# EAGLE board Loggrid-Sensor (EAGLE 5.11)
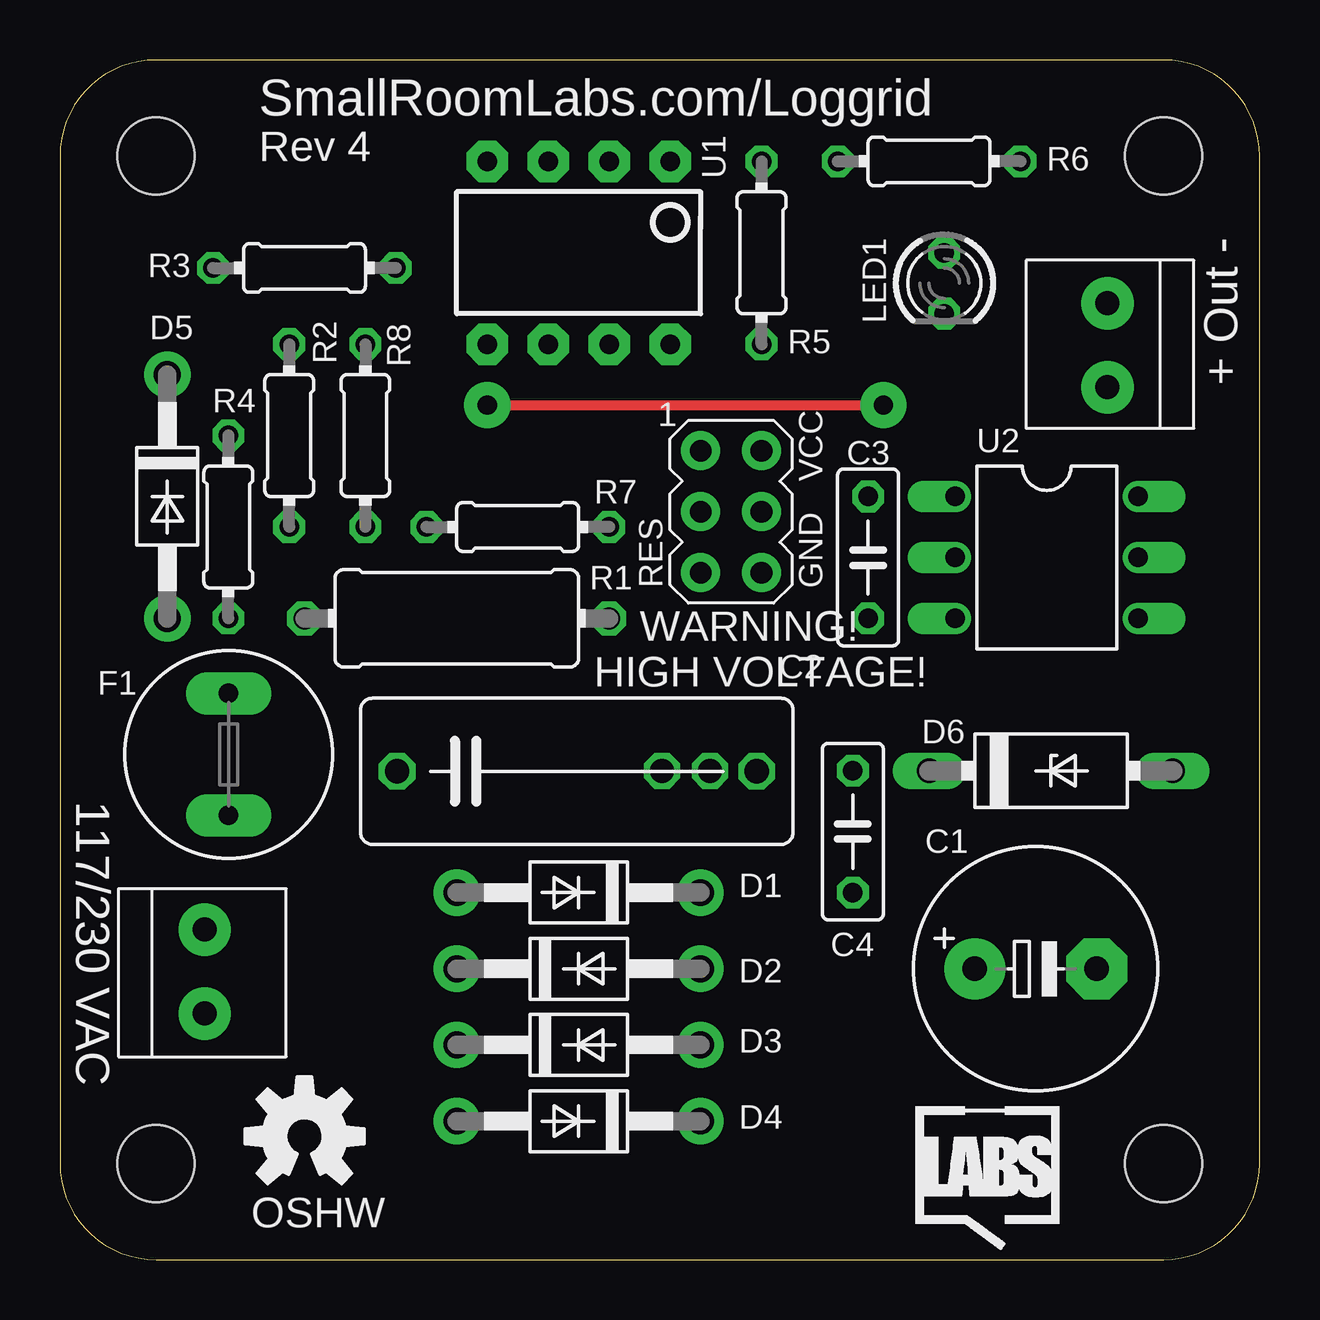
[diagram p0: board, top side]
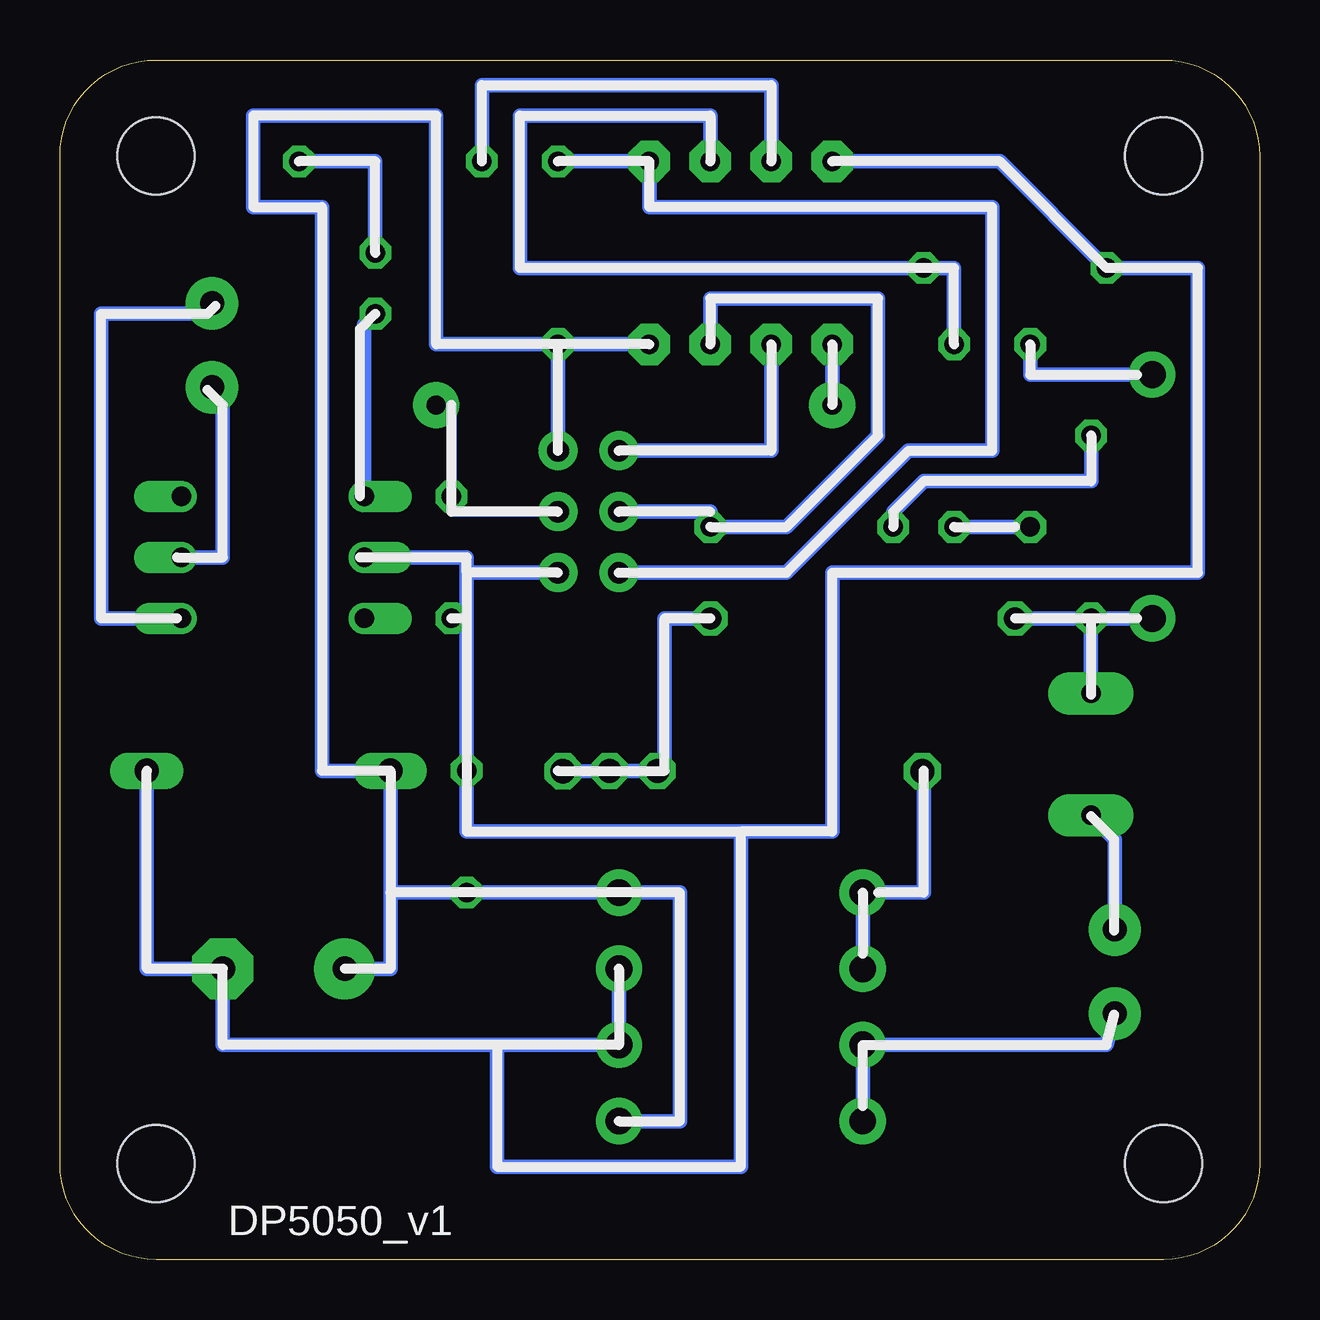
[diagram p1: board, bottom side, seen from below]

Size 50 x 50 mm. Coordinates in mm from the lower left corner, seen from the top.
Copper layers (1*16): Top 0.035mm / dielectric 1.5mm / Bottom 0.035mm
Design rules "Fusion_eagle_rule_v1.1": minimum track width 6mil, minimum drill 12mil, track to track 6mil, track to pad 6mil, pad to pad 6mil, via to via 6mil, smd to smd 0mil, copper to edge 10mil, drill to drill 10mil, minimum pad ring 10mil, minimum via ring 6mil, stop-mask expansion 2mil, vias tented up to drill 100mil, thermal gap 10mil
Net classes: 0 default: width 0.406 mm, drill 0.305 mm, clearance 0.61 mm; 1 HV: width 0.406 mm, clearance 0.61 mm
tKeepout: area 12.7,1.3 to 33.1,20.4

## Footprints (pad centres in the part's own frame; a part is rotated, then mirrored left to right if it is on the bottom)
E5-10,5 = drill 1.016 pad 2.54 round: + -2.54,0 | drill 1.016 pad 2.54 octagon: - 2.54,0
C150-064X183 = drill 1.016 octagon: 1 -7.493,0; 2 7.493,0
C050-025X075 = drill 0.813 octagon: 1 -2.54,0; 2 2.54,0
DO41-10 = drill 1.118 pad 1.93 round: A 5.08,0; C -5.08,0
F126Z10 = drill 1.016 long: A 5.08,0; C -5.08,0
TR5 = drill 0.813 pad 1.778 long: 1 -2.54,0; 2 2.54,0
AVRISP = drill 0.9 pad 1.626 round: 1 -1.27,2.54; 2 1.27,2.54; 3 -1.27,0; 4 1.27,0; 5 -1.27,-2.54; 6 1.27,-2.54
1X2-3.5MM = drill 1 pad 2.184 round: 1 1.8,0; 2 -1.7,0
LED3MM = drill 0.813 octagon: A -1.27,0; K 1.27,0
DP5050_V1 = hole 3.2: 4,4; 46,4; 46,46; 4,46
0411/12 = drill 0.914 octagon: 1 -6.35,0; 2 6.35,0
0204/7 = drill 0.813 octagon: 1 -3.81,0; 2 3.81,0
DIP08 = drill 0.813 pad 1.727 octagon: 1 -3.81,-3.81; 2 -1.27,-3.81; 3 1.27,-3.81; 4 3.81,-3.81; 5 3.81,3.81; 6 1.27,3.81; 7 -1.27,3.81; 8 -3.81,3.81
DIL06 = drill 0.813 offset: 1 -2.54,-3.81; 2 0,-3.81; 3 2.54,-3.81; 4 2.54,3.81; 5 0,3.81; 6 -2.54,3.81

## Placement (x,y rotation side)
C1  470u  [E5-10,5]  40.67,12.12 0 top
C2  0.33uF  [C150-064X183]  21.54,20.35 0 top
C3  100nF  [C050-025X075]  33.69,29.27 270 top
C4  100nF  [C050-025X075]  33.05,17.84 90 top
D1  1N4004  [DO41-10]  21.62,15.29 180 top
D2  1N4004  [DO41-10]  21.62,12.12 0 top
D3  1N4004  [DO41-10]  21.62,8.95 0 top
D4  1N4004  [DO41-10]  21.62,5.77 180 top
D5  1N4004  [DO41-10]  4.48,31.8 270 top
D6  5.1v  [F126Z10]  41.3,20.38 0 top
F1  [TR5]  7.03,21.05 90 top
ICSP  AVRISP-6  [AVRISP]  27.97,31.17 0 top
J1  1X2-3.5MM  [1X2-3.5MM]  6.03,12.05 270 top
J2  1X2-3.5MM  [1X2-3.5MM]  43.66,38.05 90 top
LED1  [LED3MM]  36.86,40.7 270 top
PCB1  PCB_DP_SQUARE-5X5  [DP5050_V1]  0,0 0 top
R1  270  [0411/12]  16.54,26.73 0 top
R2  470k  [0204/7]  9.55,34.34 270 top
R3  4k7  [0204/7]  10.19,41.33 0 top
R4  470k  [0204/7]  7.02,30.54 90 top
R5  20k  [0204/7]  29.24,41.96 270 top
R6  270  [0204/7]  36.23,45.77 0 top
R7  470k  [0204/7]  19.08,30.54 0 top
R8  470k  [0204/7]  12.73,34.34 90 top
U1  ATTINY45DIP8  [DIP08]  21.62,41.96 180 top
U2  4N35  [DIL06]  41.13,29.27 270 top
U$2  [SRL-LOGO-SILK-5MM]  35.62,1.45 0 top
U$3  [OSHW-LOGO-M]  10.19,5.13 0 top

## Library data of the parts
C1 = resistor
C2-C4 R1-R8 = rcl
D1-D5 ICSP J1 J2 = adafruit
D6 = diode
F1 = fuse; OC_FARNELL: unknown; OC_NEWARK: unknown
LED1 = led
PCB1 = dp_devices
U1 U$3 = SparkFun
U2 = optocoupler; MF: FAIRCHILD SEMICONDUCTOR; MPN: 4N35; OC_FARNELL: 1328375; OC_NEWARK: 72K9946
U$2 = SmallRoomLabs

## Nets
GND: C1.- C3.2 C4.2 D2.A D3.A D6.A ICSP.6 R3.1 U1.4 U2.2
MISO: ICSP.1 U1.6
MOSI: C3.1 ICSP.4 U1.5
N$1: D3.C D4.A J1.1
N$2: R2.2 R8.1
N$3: LED1.K U2.1
N$4: R4.2 R7.1
N$5 [HV]: F1.1 J1.2
N$6: D5.A F1.2 R1.1 R4.1
N$7: J2.1 U2.4
N$8: LED1.A R6.2
N$9: R6.1 U1.3
N$10 [HV]: D5.C R2.1
N$11: C2.2 R1.2
N$12 [HV]: C2.1 D1.A D2.C
N$13: J2.2 U2.5
N$14: R3.2 R8.2 U1.2
RES: ICSP.5 R5.1 U1.1
SCK: ICSP.3 R7.2 U1.7
VCC: C1.+ C4.1 D1.C D4.C D6.C ICSP.2 R5.2 U1.8

## Tracks (layer width: path | path; a pad name or v marks a point on that pad's centre or on a via)
GND
  Bottom 0.406: 33.05,26.73 C3.2
  Bottom 0.61: D2.A D3.A 31.78,8.95 | D6.A 46.38,12.12 C1.- 43.21,8.95 31.78,8.95 | 31.78,8.95 31.78,3.87 21.62,3.87 21.62,17.84 | U1.4 10.82,45.77 R3.1 2.57,41.33 2.57,28.63 17.81,28.63 17.81,17.84 21.62,17.84 | 33.05,28.63 ICSP.6 | 21.62,17.84 33.05,17.84 C4.2 33.05,26.73 33.05,28.63 | 33.05,28.63 33.05,29.27 U2.2
MISO
  Bottom 0.61: U1.6 20.35,33.71 ICSP.1
MOSI  (via drill 0.8 pad 1.93)
  Top 0.406: v17.81,35.62 v34.32,35.62
  Bottom 0.406: v34.32,35.62 33.69,35.62 C3.1 33.69,31.17 ICSP.4
  Bottom 0.61: v17.81,35.62 U1.5
N$1
  Bottom 0.61: D4.A D3.C 6.38,8.95 J1.1
N$2
  Bottom 0.61: R2.2 R8.1
N$3
  Bottom 0.61: U2.1 37.32,38.96 LED1.K
N$4
  Bottom 0.61: R7.1 15.27,31.17 14,32.44 7.02,32.44 R4.2
N$5
  Bottom 0.61: J1.2 6.03,17.52 F1.1
N$6
  Bottom 0.61: R4.1 D5.A | R4.1 F1.2 | R4.1 R1.1
N$7
  Bottom 0.61: U2.4 48.29,26.73 48.29,39.42 43.96,39.42 J2.1
N$8
  Bottom 0.61: LED1.A 36.86,45.77 R6.2
N$9
  Bottom 0.61: R6.1 32.41,48.95 20.35,48.95 U1.3
N$10
  Bottom 0.61: R2.1 9.55,36.88 D5.C
N$11  (via drill 1)  (1 unrouted)
  Bottom 0.61: R1.2 24.8,26.73 24.8,20.38 v27.09,20.38 C2.2
  other vias: 25.09,20.38
N$12
  Bottom 0.61: D2.C D1.A 14,15.29 14,20.38 C2.1
N$13
  Bottom 0.61: U2.5 43.21,29.27 43.21,35.67 J2.2
N$14
  Bottom 0.61: U1.2 22.89,47.68 30.83,47.68 30.83,41.33 R3.2 12.73,41.33 R8.2
RES
  Bottom 0.61: R5.1 U1.1 25.43,43.87 11.14,43.87 11.14,33.71 14.63,33.71 19.71,28.63 ICSP.5
SCK
  Bottom 0.61: ICSP.3 22.89,31.17 R7.2 19.71,30.54 15.9,34.34 15.9,40.06 22.89,40.06 U1.7
VCC
  Bottom 0.61: 36.23,15.29 36.23,12.12 C1.+ | 36.23,15.29 D6.C 39.08,20.38 39.08,43.87 41.94,43.87 41.94,47.68 34.32,47.68 34.32,38.16 R5.2 | D4.C 24.16,5.77 24.16,15.29 D1.C C4.1 36.23,15.29 | R5.2 U1.8 | R5.2 ICSP.2

## Text on the board
tPlace: SmallRoomLabs.com/Loggrid | Rev 4 | U1 | + Out - | VCC | RES | GND | WARNING! | HIGH VOLTAGE! | 117/230 VAC | OSHW